# Altium PCB TB6600_Base.PcbDoc (part 1 of 4)
Units mm, origin at the board's own origin, x right, y up, seen from the top; angles counter-clockwise.
Board outline 300 x 300 mm, 2 copper layers (Top Layer, Bottom Layer); 129 components, 65 nets, 411 pads, 153 vias.
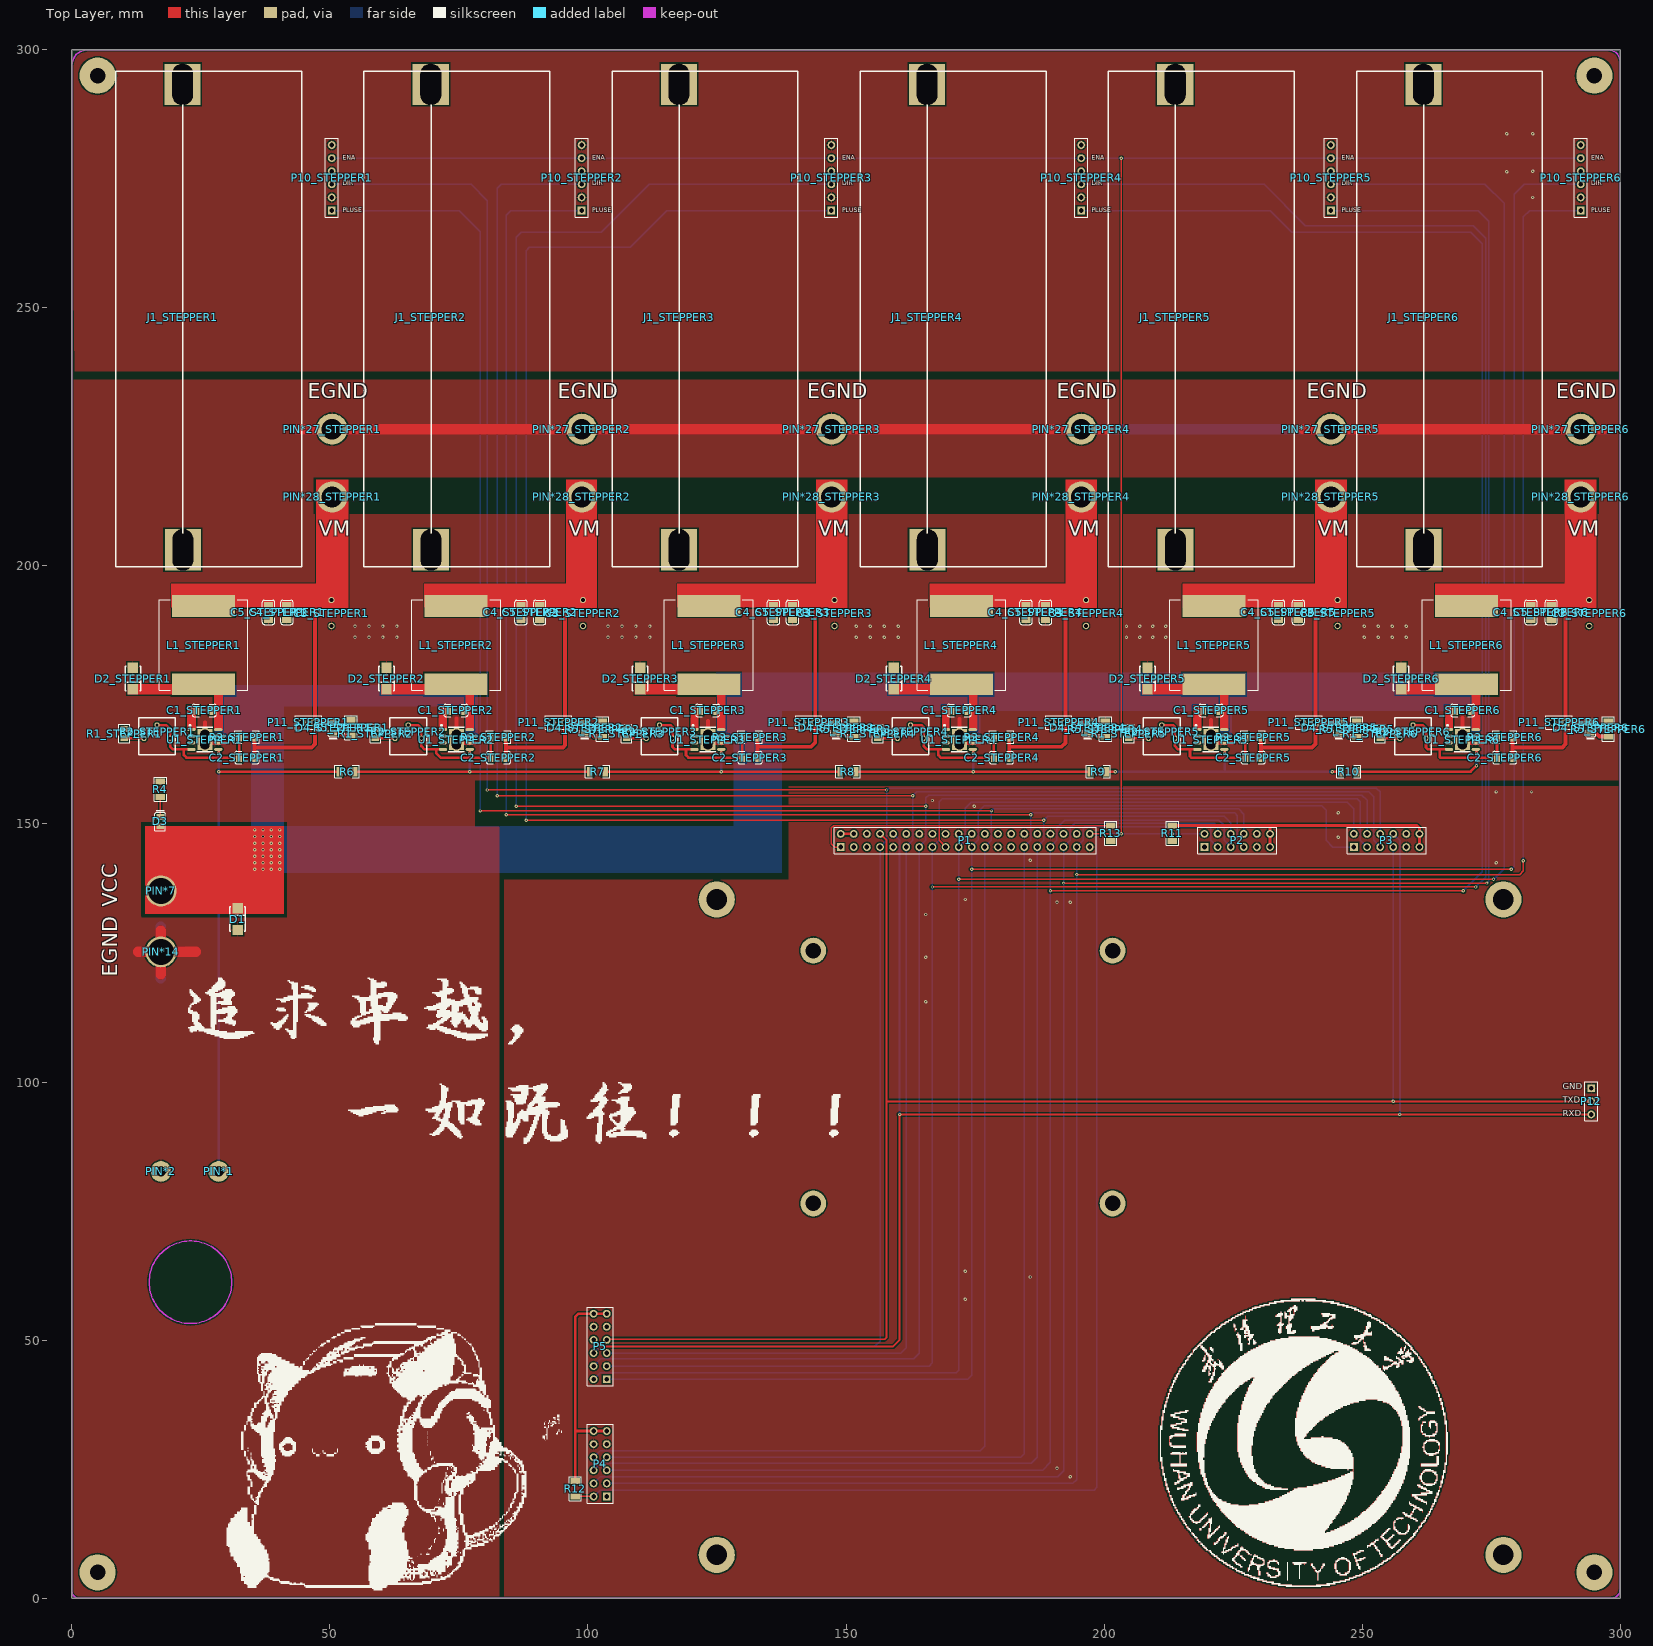
[diagram p0: Top Layer view]
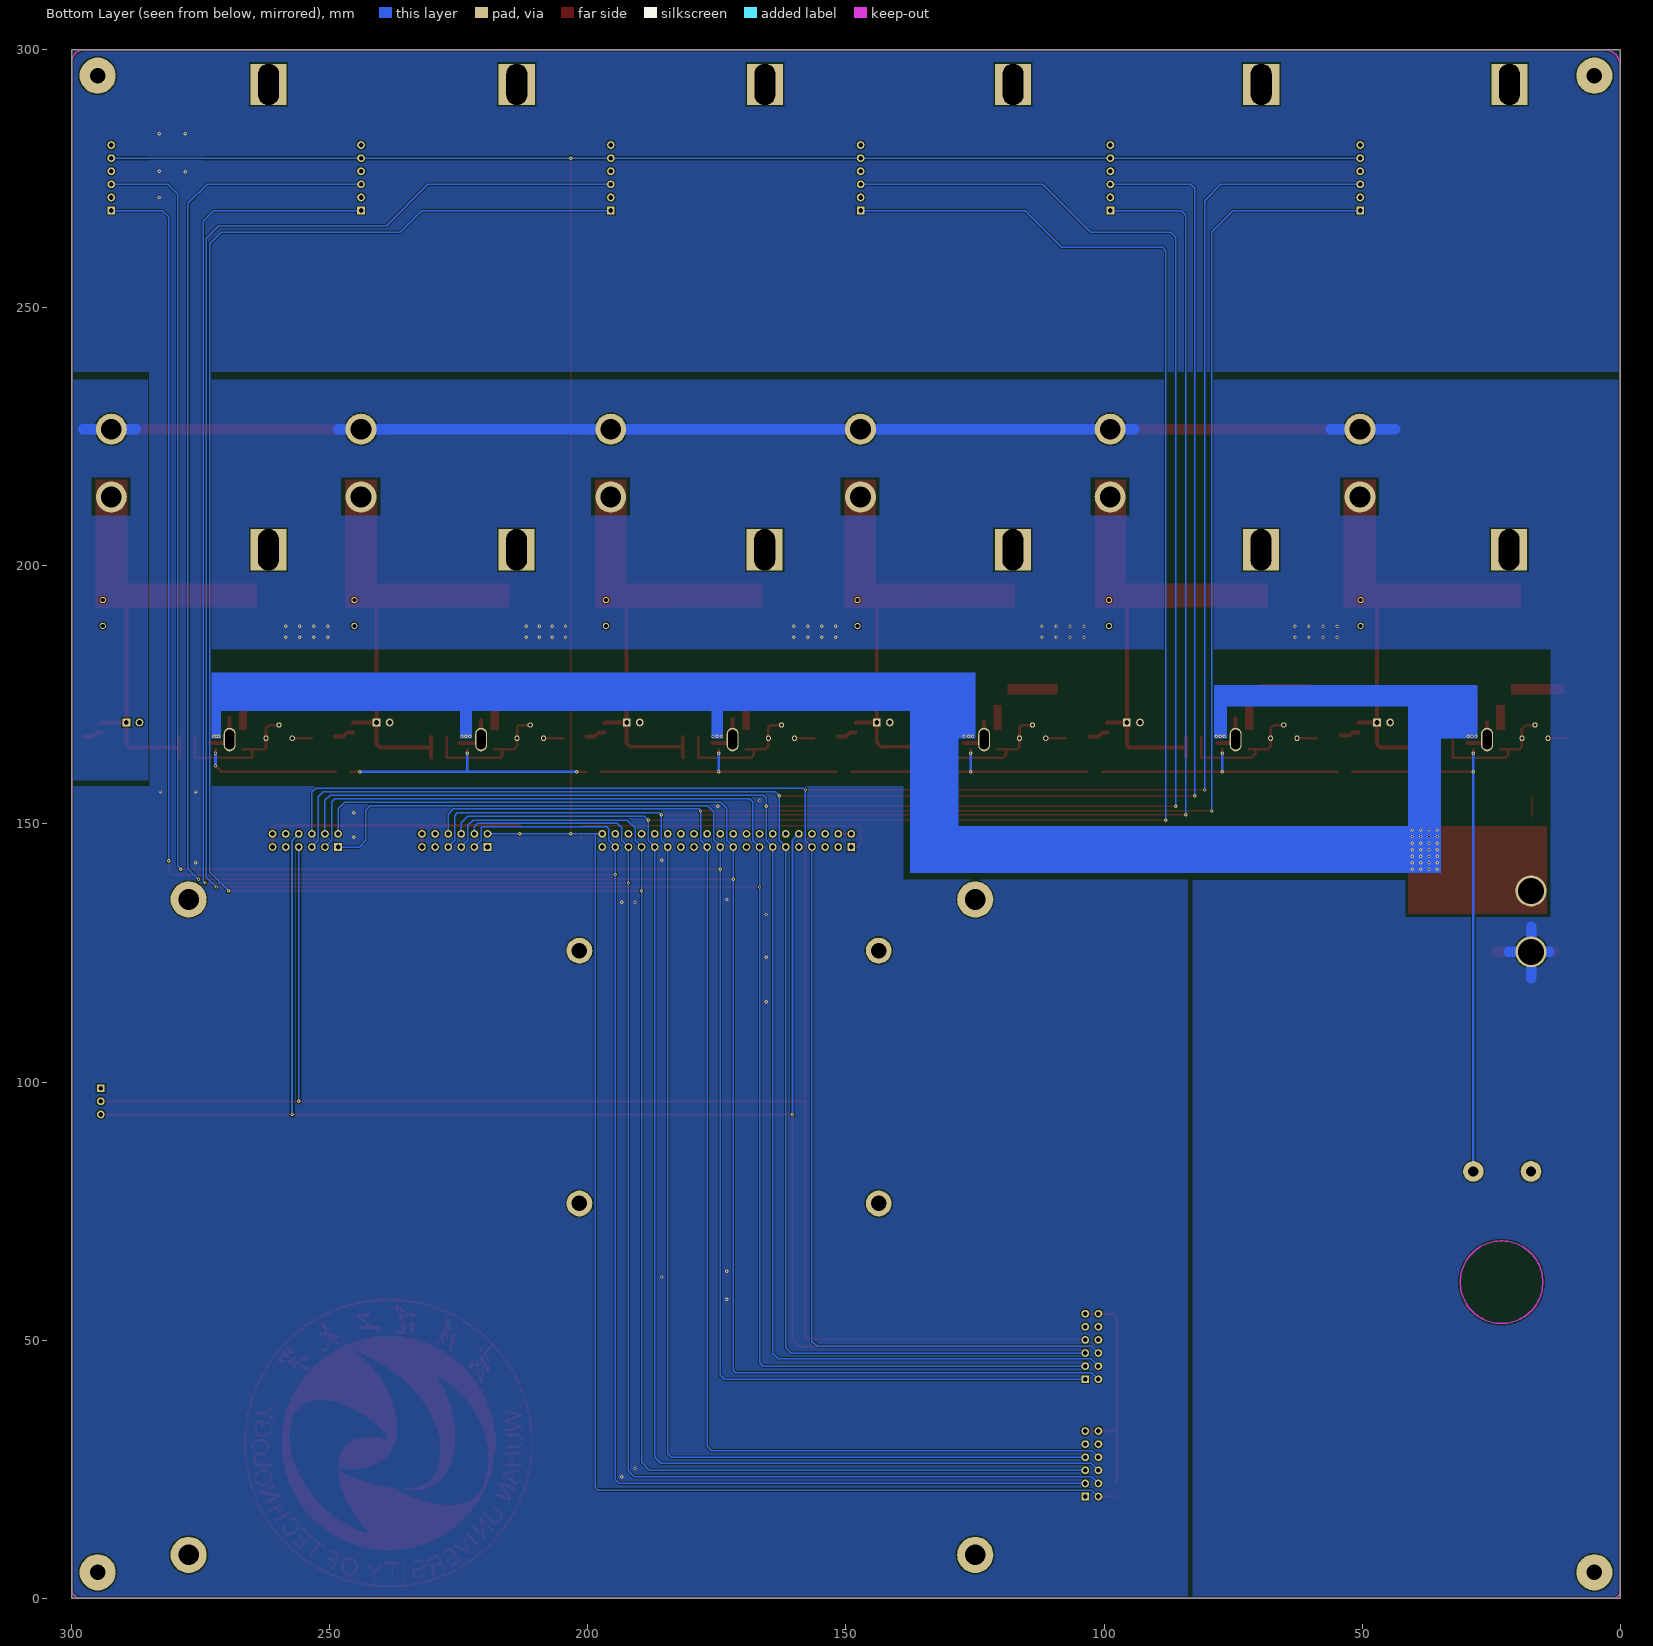
[diagram p1: Bottom Layer view, seen from below]

## Layer stack, top to bottom
Top Solder: solder mask 0.0102, Solder Resist, Dk 3.5
Top Layer: signal copper 0.0356
Dielectric 1: dielectric 0.32, FR-4, Dk 4.8
Bottom Layer: signal copper 0.0356
Bottom Solder: solder mask 0.0102, Solder Resist, Dk 3.5

## Board outline
0,0 0,300 300,300 300,0

## Design rules (kind name [scope] priority, off if disabled: settings)
Clearance [All] p1: gap=0.254 ignorepadtopadclearanceinfootprint=FALSE except(0: Arc-Hole Track-Hole SMDPad-Hole THPad-Hole Via-Hole Fill-Hole Poly-Hole Region-Hole Text-Hole)
PolygonConnect [All] p1: thpad.connectstyle=Relief thpad.reliefconductorwidth=0.254 thpad.reliefentries=4 thpad.polygonreliefangle="90 Angle" thpad.airgapwidth=0.254 smdpad.connectstyle=Relief smdpad.reliefconductorwidth=0.254 smdpad.reliefentries=4 smdpad.polygonreliefangle="90 Angle" smdpad.airgapwidth=0.254 via.connectstyle=Direct via.reliefconductorwidth=0.254 via.reliefentries=4 via.polygonreliefangle="90 Angle" via.airgapwidth=0.254
RoutingVias [All] p1: holewidth=0.711 width=1.27 viastyle="Through Hole" minholewidth=0.711 minwidth=1.27 maxholewidth=0.711 maxwidth=1.27
SolderMaskExpansion [All] p1: expansion=0.102
Width [All] p1: maxlimit=2.032 minlimit=0.152 preferedwidth=0.254 minimp=50.000000 maximp=50.000000 favimp=50.000000
30 further rules are at their usual default settings.

## Classes and differential pairs
net class SAFTY[1..6]: SAFTY1 SAFTY2 SAFTY3 SAFTY4 SAFTY5 SAFTY6
net class PLUSE[1..6]: PLUSE1 PLUSE2 PLUSE3 PLUSE4 PLUSE5 PLUSE6
net class DIR[1..6]: DIR1 DIR2 DIR3 DIR4 DIR5 DIR6
channel class TB6000: STEPPER1 STEPPER2 STEPPER3 STEPPER4 STEPPER5 STEPPER6
component class STEPPER6: C1_STEPPER6 C2_STEPPER6 C3_STEPPER6 C4_STEPPER6 C5_STEPPER6 D2_STEPPER6 D4_STEPPER6 J1_STEPPER6 L1_STEPPER6 P10_STEPPER6 P11_STEPPER6 PIN*27_STEPPER6 PIN*28_STEPPER6 R1_STEPPER6 R2_STEPPER6 R3_STEPPER6 R5_STEPPER6 U1_STEPPER6
component class STEPPER5: C1_STEPPER5 C2_STEPPER5 C3_STEPPER5 C4_STEPPER5 C5_STEPPER5 D2_STEPPER5 D4_STEPPER5 J1_STEPPER5 L1_STEPPER5 P10_STEPPER5 P11_STEPPER5 PIN*27_STEPPER5 PIN*28_STEPPER5 R1_STEPPER5 R2_STEPPER5 R3_STEPPER5 R5_STEPPER5 U1_STEPPER5
component class STEPPER4: C1_STEPPER4 C2_STEPPER4 C3_STEPPER4 C4_STEPPER4 C5_STEPPER4 D2_STEPPER4 D4_STEPPER4 J1_STEPPER4 L1_STEPPER4 P10_STEPPER4 P11_STEPPER4 PIN*27_STEPPER4 PIN*28_STEPPER4 R1_STEPPER4 R2_STEPPER4 R3_STEPPER4 R5_STEPPER4 U1_STEPPER4
component class STEPPER3: C1_STEPPER3 C2_STEPPER3 C3_STEPPER3 C4_STEPPER3 C5_STEPPER3 D2_STEPPER3 D4_STEPPER3 J1_STEPPER3 L1_STEPPER3 P10_STEPPER3 P11_STEPPER3 PIN*27_STEPPER3 PIN*28_STEPPER3 R1_STEPPER3 R2_STEPPER3 R3_STEPPER3 R5_STEPPER3 U1_STEPPER3
component class STEPPER2: C1_STEPPER2 C2_STEPPER2 C3_STEPPER2 C4_STEPPER2 C5_STEPPER2 D2_STEPPER2 D4_STEPPER2 J1_STEPPER2 L1_STEPPER2 P10_STEPPER2 P11_STEPPER2 PIN*27_STEPPER2 PIN*28_STEPPER2 R1_STEPPER2 R2_STEPPER2 R3_STEPPER2 R5_STEPPER2 U1_STEPPER2
component class STEPPER1: C1_STEPPER1 C2_STEPPER1 C3_STEPPER1 C4_STEPPER1 C5_STEPPER1 D2_STEPPER1 D4_STEPPER1 J1_STEPPER1 L1_STEPPER1 P10_STEPPER1 P11_STEPPER1 PIN*27_STEPPER1 PIN*28_STEPPER1 R1_STEPPER1 R2_STEPPER1 R3_STEPPER1 R5_STEPPER1 U1_STEPPER1
component class BASE-B: D1 D3 P1 P2 P3 P4 P5 P12 PIN*1 PIN*2 PIN*7 PIN*14 R4 R6 R7 R8 R9 R10 R11 R12 R13

## Components (designator, comment, footprint, x,y, rotation, side; value= is the part's Value field where it differs from the comment)
C1_STEPPER1 "10nF (103) 10% 50V" 1206_C 25.654,172.017 r0 top (schematic designator C1)
C1_STEPPER2 "10nF (103) 10% 50V" 1206_C 74.422,172.017 r0 top (schematic designator C1)
C1_STEPPER3 "10nF (103) 10% 50V" 1206_C 123.19,172.017 r0 top (schematic designator C1)
C1_STEPPER4 "10nF (103) 10% 50V" 1206_C 171.958,172.017 r0 top (schematic designator C1)
C1_STEPPER5 "10nF (103) 10% 50V" 1206_C 220.726,172.017 r0 top (schematic designator C1)
C1_STEPPER6 "10nF (103) 10% 50V" 1206_C 269.494,172.017 r0 top (schematic designator C1)
C2_STEPPER1 "1nF (102) 10% 500V" 1206_C 33.909,162.865 r180 top (schematic designator C2)
C2_STEPPER2 "1nF (102) 10% 500V" 1206_C 82.652,162.865 r180 top (schematic designator C2)
C2_STEPPER3 "1nF (102) 10% 500V" 1206_C 131.394,162.865 r180 top (schematic designator C2)
C2_STEPPER4 "1nF (102) 10% 500V" 1206_C 180.137,162.865 r180 top (schematic designator C2)
C2_STEPPER5 "1nF (102) 10% 500V" 1206_C 228.879,162.865 r180 top (schematic designator C2)
C2_STEPPER6 "1nF (102) 10% 500V" 1206_C 277.622,162.865 r180 top (schematic designator C2)
C3_STEPPER1 "Cap" C100uF 50.292,190.881 r0 top value=100uF (schematic designator C3)
C3_STEPPER2 "Cap" C100uF 99.035,190.881 r0 top value=100uF (schematic designator C3)
C3_STEPPER3 "Cap" C100uF 147.777,190.881 r0 top value=100uF (schematic designator C3)
C3_STEPPER4 "Cap" C100uF 196.52,190.881 r0 top value=100uF (schematic designator C3)
C3_STEPPER5 "Cap" C100uF 245.262,190.881 r0 top value=100uF (schematic designator C3)
C3_STEPPER6 "Cap" C100uF 294.005,190.881 r0 top value=100uF (schematic designator C3)
C4_STEPPER1 "4.7uF (475) 10% 50V" 1206_C 41.656,191.008 r270 top (schematic designator C4)
C4_STEPPER2 "4.7uF (475) 10% 50V" 1206_C 87.02,191.008 r270 top (schematic designator C4)
C4_STEPPER3 "4.7uF (475) 10% 50V" 1206_C 135.941,191.008 r270 top (schematic designator C4)
C4_STEPPER4 "4.7uF (475) 10% 50V" 1206_C 184.861,191.008 r270 top (schematic designator C4)
C4_STEPPER5 "4.7uF (475) 10% 50V" 1206_C 233.782,191.008 r270 top (schematic designator C4)
C4_STEPPER6 "4.7uF (475) 10% 50V" 1206_C 282.702,191.008 r270 top (schematic designator C4)
C5_STEPPER1 "10nF (103) 10% 50V" 1206_C 38.1,191.008 r270 top (schematic designator C5)
C5_STEPPER2 "10nF (103) 10% 50V" 1206_C 90.653,191.008 r270 top (schematic designator C5)
C5_STEPPER3 "10nF (103) 10% 50V" 1206_C 139.649,191.008 r270 top (schematic designator C5)
C5_STEPPER4 "10nF (103) 10% 50V" 1206_C 188.646,191.008 r270 top (schematic designator C5)
C5_STEPPER5 "10nF (103) 10% 50V" 1206_C 237.642,191.008 r270 top (schematic designator C5)
C5_STEPPER6 "10nF (103) 10% 50V" 1206_C 286.639,191.008 r270 top (schematic designator C5)
D1 "M7" SMA(DO-214AC)_S1 32.131,131.572 r270 top
D2_STEPPER1 "SS54" SMA(DO-214AC)_S1 11.811,178.181 r90 top (schematic designator D2)
D2_STEPPER2 "SS54" SMA(DO-214AC)_S1 60.96,178.181 r90 top (schematic designator D2)
D2_STEPPER3 "SS54" SMA(DO-214AC)_S1 110.109,178.181 r90 top (schematic designator D2)
D2_STEPPER4 "SS54" SMA(DO-214AC)_S1 159.258,178.181 r90 top (schematic designator D2)
D2_STEPPER5 "SS54" SMA(DO-214AC)_S1 208.407,178.181 r90 top (schematic designator D2)
D2_STEPPER6 "SS54" SMA(DO-214AC)_S1 257.556,178.181 r90 top (schematic designator D2)
D3 "白灯 0805" 0805_LED_S1 17.107,150.495 r270 top
D4_STEPPER1 "翠绿 0805" 0805_LED_S1 50.673,168.656 r90 top (schematic designator D4)
D4_STEPPER2 "翠绿 0805" 0805_LED_S1 99.39,168.656 r90 top (schematic designator D4)
D4_STEPPER3 "翠绿 0805" 0805_LED_S1 148.107,168.656 r90 top (schematic designator D4)
D4_STEPPER4 "翠绿 0805" 0805_LED_S1 196.825,168.656 r90 top (schematic designator D4)
D4_STEPPER5 "翠绿 0805" 0805_LED_S1 245.542,168.656 r90 top (schematic designator D4)
D4_STEPPER6 "翠绿 0805" 0805_LED_S1 294.259,168.656 r90 top (schematic designator D4)
J1_STEPPER1 "Socket" PCBComponent_1 8.509,199.83 r0 top (schematic designator J1)
J1_STEPPER2 "Socket" PCBComponent_1 56.591,199.83 r0 top (schematic designator J1)
J1_STEPPER3 "Socket" PCBComponent_1 104.673,199.83 r0 top (schematic designator J1)
J1_STEPPER4 "Socket" PCBComponent_1 152.756,199.83 r0 top (schematic designator J1)
J1_STEPPER5 "Socket" PCBComponent_1 200.838,199.83 r0 top (schematic designator J1)
J1_STEPPER6 "Socket" PCBComponent_1 248.92,199.83 r0 top (schematic designator J1)
L1_STEPPER1 "Inductor" INDP175172X70M 25.527,184.658 r90 top value=15uH (schematic designator L1)
L1_STEPPER2 "Inductor" INDP175172X70M 74.473,184.658 r90 top value=15uH (schematic designator L1)
L1_STEPPER3 "Inductor" INDP175172X70M 123.419,184.658 r90 top value=15uH (schematic designator L1)
L1_STEPPER4 "Inductor" INDP175172X70M 172.364,184.658 r90 top value=15uH (schematic designator L1)
L1_STEPPER5 "Inductor" INDP175172X70M 221.31,184.658 r90 top value=15uH (schematic designator L1)
L1_STEPPER6 "Inductor" INDP175172X70M 270.256,184.658 r90 top value=15uH (schematic designator L1)
P1 "Header 20X2" HDR2X20 148.971,145.542 r0 top
P2 "Header 6X2" HDR2X6 219.456,145.542 r0 top
P3 "Header 6X2" HDR2X6 248.412,145.542 r0 top
P4 "Header 6X2" HDR2X6 103.632,19.685 r90 top
P5 "Header 6X2" HDR2X6 103.632,42.418 r90 top
P10_STEPPER1 "Header 6" HDR1X6 50.373,268.859 r90 top (schematic designator P10)
P10_STEPPER2 "Header 6" HDR1X6 98.769,268.859 r90 top (schematic designator P10)
P10_STEPPER3 "Header 6" HDR1X6 147.165,268.859 r90 top (schematic designator P10)
P10_STEPPER4 "Header 6" HDR1X6 195.561,268.859 r90 top (schematic designator P10)
P10_STEPPER5 "Header 6" HDR1X6 243.958,268.859 r90 top (schematic designator P10)
P10_STEPPER6 "Header 6" HDR1X6 292.354,268.859 r90 top (schematic designator P10)
P11_STEPPER1 "Header 2" HDR1X2 47.117,169.672 r180 top (schematic designator P11)
P11_STEPPER2 "Header 2" HDR1X2 95.58,169.672 r180 top (schematic designator P11)
P11_STEPPER3 "Header 2" HDR1X2 144.043,169.672 r180 top (schematic designator P11)
P11_STEPPER4 "Header 2" HDR1X2 192.507,169.672 r180 top (schematic designator P11)
P11_STEPPER5 "Header 2" HDR1X2 240.97,169.672 r180 top (schematic designator P11)
P11_STEPPER6 "Header 2" HDR1X2 289.433,169.672 r180 top (schematic designator P11)
P12 "Header 3" HDR1X3 294.386,98.806 r270 top
PIN*1 "PIN" PIN#1 28.448,82.677 r0 top
PIN*2 "PIN" PIN#1 17.272,82.677 r0 top
PIN*7 "PIN" PIN#2 17.272,137.033 r0 top
PIN*14 "PIN" PIN#2 17.272,125.222 r0 top
PIN*27_STEPPER1 "PIN" PIN#3 50.419,226.509 r90 top (schematic designator PIN*27)
PIN*27_STEPPER2 "PIN" PIN#3 98.806,226.509 r90 top (schematic designator PIN*27)
PIN*27_STEPPER3 "PIN" PIN#3 147.193,226.509 r90 top (schematic designator PIN*27)
PIN*27_STEPPER4 "PIN" PIN#3 195.58,226.509 r90 top (schematic designator PIN*27)
PIN*27_STEPPER5 "PIN" PIN#3 243.967,226.509 r90 top (schematic designator PIN*27)
PIN*27_STEPPER6 "PIN" PIN#3 292.354,226.509 r90 top (schematic designator PIN*27)
PIN*28_STEPPER1 "PIN" PIN#3 50.419,213.36 r90 top (schematic designator PIN*28)
PIN*28_STEPPER2 "PIN" PIN#3 98.806,213.36 r90 top (schematic designator PIN*28)
PIN*28_STEPPER3 "PIN" PIN#3 147.193,213.36 r90 top (schematic designator PIN*28)
PIN*28_STEPPER4 "PIN" PIN#3 195.58,213.36 r90 top (schematic designator PIN*28)
PIN*28_STEPPER5 "PIN" PIN#3 243.967,213.36 r90 top (schematic designator PIN*28)
PIN*28_STEPPER6 "PIN" PIN#3 292.354,213.36 r90 top (schematic designator PIN*28)
R1_STEPPER1 "510Ω (5100) ±1%" 0805_R 10.16,167.513 r270 top (schematic designator R1)
R1_STEPPER2 "510Ω (5100) ±1%" 0805_R 58.826,167.513 r270 top (schematic designator R1)
R1_STEPPER3 "510Ω (5100) ±1%" 0805_R 107.493,167.513 r270 top (schematic designator R1)
R1_STEPPER4 "510Ω (5100) ±1%" 0805_R 156.159,167.513 r270 top (schematic designator R1)
R1_STEPPER5 "510Ω (5100) ±1%" 0805_R 204.826,167.513 r270 top (schematic designator R1)
R1_STEPPER6 "510Ω (5100) ±1%" 0805_R 253.492,167.513 r270 top (schematic designator R1)
R2_STEPPER1 "RPot" RP1 16.51,167.894 r0 top value=1K (schematic designator R2)
R2_STEPPER2 "RPot" RP1 65.176,167.894 r0 top value=1K (schematic designator R2)
R2_STEPPER3 "RPot" RP1 113.843,167.894 r0 top value=1K (schematic designator R2)
R2_STEPPER4 "RPot" RP1 162.509,167.894 r0 top value=1K (schematic designator R2)
R2_STEPPER5 "RPot" RP1 211.176,167.894 r0 top value=1K (schematic designator R2)
R2_STEPPER6 "RPot" RP1 259.842,167.894 r0 top value=1K (schematic designator R2)
R3_STEPPER1 "10KΩ (1002) ±1%" 1206_R 33.909,166.853 r180 top (schematic designator R3)
R3_STEPPER2 "10KΩ (1002) ±1%" 1206_R 82.652,166.853 r180 top (schematic designator R3)
R3_STEPPER3 "10KΩ (1002) ±1%" 1206_R 131.394,166.853 r180 top (schematic designator R3)
R3_STEPPER4 "10KΩ (1002) ±1%" 1206_R 180.137,166.853 r180 top (schematic designator R3)
R3_STEPPER5 "10KΩ (1002) ±1%" 1206_R 228.879,166.853 r180 top (schematic designator R3)
R3_STEPPER6 "10KΩ (1002) ±1%" 1206_R 277.622,166.853 r180 top (schematic designator R3)
R4 "4.7KΩ (4701) ±1%" 1206_R 17.145,156.718 r90 top
R5_STEPPER1 "4.7KΩ (4701) ±1%" 1206_R 54.102,168.656 r90 top (schematic designator R5)
R5_STEPPER2 "4.7KΩ (4701) ±1%" 1206_R 102.819,168.403 r90 top (schematic designator R5)
R5_STEPPER3 "4.7KΩ (4701) ±1%" 1206_R 151.536,168.403 r90 top (schematic designator R5)
R5_STEPPER4 "4.7KΩ (4701) ±1%" 1206_R 200.254,168.403 r90 top (schematic designator R5)
R5_STEPPER5 "4.7KΩ (4701) ±1%" 1206_R 248.971,168.403 r90 top (schematic designator R5)
R5_STEPPER6 "4.7KΩ (4701) ±1%" 1206_R 297.688,168.403 r90 top (schematic designator R5)
R6 "22Ω (22R0) ±1%" 1206_R 53.34,160.147 r0 top
R7 "22Ω (22R0) ±1%" 1206_R 101.854,160.147 r0 top
R8 "22Ω (22R0) ±1%" 1206_R 150.368,160.147 r0 top
R9 "22Ω (22R0) ±1%" 1206_R 198.882,160.147 r0 top
R10 "22Ω (22R0) ±1%" 1206_R 247.396,160.147 r0 top
R11 "10KΩ (1002) ±1%" 1206_R 213.233,148.209 r90 top
R12 "10KΩ (1002) ±1%" 1206_R 97.536,21.209 r90 top
R13 "10KΩ (1002) ±1%" 1206_R 201.295,148.209 r90 top
U1_STEPPER1 "TPS5450" LC-SOP-8_EP_150mil 25.781,166.37 r270 top (schematic designator U1)
U1_STEPPER2 "TPS5450" LC-SOP-8_EP_150mil 74.51,166.37 r270 top (schematic designator U1)
U1_STEPPER3 "TPS5450" LC-SOP-8_EP_150mil 123.239,166.37 r270 top (schematic designator U1)
U1_STEPPER4 "TPS5450" LC-SOP-8_EP_150mil 171.969,166.37 r270 top (schematic designator U1)
U1_STEPPER5 "TPS5450" LC-SOP-8_EP_150mil 220.698,166.37 r270 top (schematic designator U1)
U1_STEPPER6 "TPS5450" LC-SOP-8_EP_150mil 269.427,166.37 r270 top (schematic designator U1)

## Footprints (in the part's own frame and the unit in brackets; to place one, negate y for a bottom-side part, rotate by r counter-clockwise, add the part's x,y. Pads: shape width x height; smd on the part's side, far side on the other; paste and mask are expansions set on the pad)
0805_LED_S1 [mm]
  rect 1.16x1.47 smd: A(0.89,0) K(-0.89,0)
  silkscreen extent -2.25,-1.04 1.77,1.03, body extent -1.01,-0.62 1.01,0.62, height 1.1
0805_R [mm]
  rect 1.16x1.47 smd: 1(-0.89,0) 2(0.89,0)
  silkscreen extent -1.77,-1.04 1.77,1.03, body extent -1,-0.62 1,0.63, height 0.49
1206_C [mm]
  rect 1.13x1.8 smd: 1(-1.49,0) 2(1.49,0)
  silkscreen extent -2.36,-1.2 2.35,1.2, body extent -1.6,-0.81 1.6,0.79, height 1
1206_R [mm]
  rect 1.13x1.8 smd: 1(-1.49,0) 2(1.49,0)
  silkscreen extent -2.36,-1.2 2.35,1.2, body extent -1.7,-0.86 1.65,0.87, height 0.85
C100uF [mm]
  round 1.2 hole 0.8: 1(0,2.5) 2(0,-2.5)
HDR1X2 [mm] "Connector; Header; 2 Position"
  rect 1.5x1.5 hole 0.9: 1(0,0)
  round 1.5 hole 0.9: 2(2.54,0)
  silkscreen extent -1.27,-1.27 3.81,1.27, body extent -1.27,-1.27 3.81,1.27, height 7.58
HDR1X3 [mm] "Connector; Header; 3 Position"
  rect 1.5x1.5 hole 0.9: 1(0,0)
  round 1.5 hole 0.9: 2(2.54,0) 3(5.08,0)
  silkscreen extent -1.27,-1.27 6.35,1.27, body extent -1.27,-1.27 6.35,1.27, height 7.58
HDR1X6 [mm] "Connector; Header; 6 Position"
  rect 1.5x1.5 hole 0.9: 1(0,0)
  round 1.5 hole 0.9: 2(2.54,0) 3(5.08,0) 4(7.62,0) 5(10.16,0) 6(12.7,0)
  silkscreen extent -1.27,-1.27 13.97,1.27, body extent -1.27,-1.27 13.97,1.27, height 7.58
HDR2X6 [mm] "Connector; Header; 6x2 Position"
  rect 1.5x1.5 hole 0.9: 1(0,0)
  round 1.5 hole 0.9: 2(0,2.54) 3(2.54,0) 4(2.54,2.54) 5(5.08,0) 6(5.08,2.54) 7(7.62,0) 8(7.62,2.54) 9(10.16,0) 10(10.16,2.54) 11(12.7,0) 12(12.7,2.54)
  silkscreen extent -1.27,-1.27 13.97,3.81, body extent -1.27,-1.27 13.97,3.81, height 7.58
HDR2X20 [mm] "Connector; Header; 20x2 Position"
  rect 1.5x1.5 hole 0.9: 1(0,0)
  round 1.5 hole 0.9: 2(0,2.54) 3(2.54,0) 4(2.54,2.54) 5(5.08,0) 6(5.08,2.54) 7(7.62,0) 8(7.62,2.54) 9(10.16,0) 10(10.16,2.54) 11(12.7,0) 12(12.7,2.54) 13(15.24,0) 14(15.24,2.54) 15(17.78,0) 16(17.78,2.54) 17(20.32,0) 18(20.32,2.54) 19(22.86,0) 20(22.86,2.54) 21(25.4,0) 22(25.4,2.54) 23(27.94,0) 24(27.94,2.54) 25(30.48,0) 26(30.48,2.54) 27(33.02,0) 28(33.02,2.54) 29(35.56,0) 30(35.56,2.54) 31(38.1,0) 32(38.1,2.54) 33(40.64,0) 34(40.64,2.54) 35(43.18,0) 36(43.18,2.54) 37(45.72,0) 38(45.72,2.54) 39(48.26,0) 40(48.26,2.54)
  silkscreen extent -1.27,-1.27 49.53,3.81, body extent -1.27,-1.27 49.53,3.81, height 7.58
INDP175172X70M [mm] "Precision Wire Wound Inductor, 2-Leads, Body 17.50x17.15mm, IPC Low Density"
  rect 4.25x12.2 smd: 1(-7.575,0) 2(7.575,0)
  silkscreen extent -8.75,-8.6 8.75,8.6, body extent -8.75,-8.57 8.75,8.57, height 7
LC-SOP-8_EP_150mil [mm] "TPS5450"
  rect 4x2.9 smd: 0(0,0)
  oval 0.6x1.6 smd: 1(-1.905,-2.6) 2(-0.635,-2.6) 3(0.635,-2.6) 4(1.905,-2.6) 5(1.905,2.6) 6(0.635,2.6) 7(-0.635,2.6) 8(-1.905,2.6)
  silkscreen extent -2.85,-3.05 2.4,1.5
PCBComponent_1 [mm]
  rect 7x8 hole 4 slot 8 at 90 deg: 9(12.954,93.472) 9(13,3.302)
  silkscreen extent 0,0 36,96
PIN#1 [mm]
  round 4 hole 2: 1(0,0)
PIN#2 [mm]
  round 6 hole 5: 1(0,0)
PIN#3 [mm]
  round 6 hole 4: 1(0,0)
RP1 [mm]
  oct 1x1 hole 0.6: 1(-2.54,-1.27) 2(0,1.27) 3(2.54,-1.27)
  silkscreen extent -3.56,-4.44 3.56,2.67, body extent -3.56,-4.44 3.56,2.67, height 6.35
SMA(DO-214AC)_S1 [mm]
  rect 2x2 smd: 1(2.1,0) 2(-2.1,0)
  silkscreen extent -2.35,-1.5 2.35,1.5

## Part data
C1_STEPPER1 C1_STEPPER2 C1_STEPPER3 C1_STEPPER4 C1_STEPPER5 C1_STEPPER6 C5_STEPPER1 C5_STEPPER2 C5_STEPPER3 C5_STEPPER4 C5_STEPPER5 C5_STEPPER6: library part "1206 10nF (103) 10% 50V", "贴片电容", Package=1206, SuppliersPartNumber=C1846, ComponentLink1Description=供应商链接, ComponentLink1URL=http://www.szlcsc.com/product/details_2198.html, Supplier=LC
C2_STEPPER1 C2_STEPPER2 C2_STEPPER3 C2_STEPPER4 C2_STEPPER5 C2_STEPPER6: library part "1206 1nF (102) 10% 500V", "贴片电容", Package=1206, SuppliersPartNumber=C35216, ComponentLink1Description=供应商链接, ComponentLink1URL=http://www.szlcsc.com/product/details_36187.html, Supplier=LC
C3_STEPPER1 C3_STEPPER2 C3_STEPPER3 C3_STEPPER4 C3_STEPPER5 C3_STEPPER6: "贴片电容", LatestRevisionDate=17-Jul-2002, LatestRevisionNote="Re-released for DXP Platform.", PackageReference=RAD-0.3, Published=8-Jun-2000, Publisher="Altium Limited"
C4_STEPPER1 C4_STEPPER2 C4_STEPPER3 C4_STEPPER4 C4_STEPPER5 C4_STEPPER6: library part "1206 4.7uF (475) 10% 50V", "贴片电容", Package=1206, SuppliersPartNumber=C29823, ComponentLink1Description=供应商链接, ComponentLink1URL=http://www.szlcsc.com/product/details_30577.html, Supplier=LC
D1: library part "SMA(DO-214AC) M7", "二极管", Package=SMA(DO-214AC), SuppliersPartNumber=C95872, ComponentLink1Description=供应商链接, ComponentLink1URL=http://www.szlcsc.com/product/details_2841.html, Supplier=LC, 备注="1N4007 4007 编号C2464 已经停售, 使用新物料编号C95872"
D2_STEPPER1 D2_STEPPER2 D2_STEPPER3 D2_STEPPER4 D2_STEPPER5 D2_STEPPER6: library part "SMA(DO-214AC) SS54", "二极管", Package=SMA(DO-214AC), SuppliersPartNumber=C22452, ComponentLink1Description=供应商链接, ComponentLink1URL=http://www.szlcsc.com/product/details_23178.html, Supplier=LC
D3: library part "0805 白灯", "发光二极管", Package=0805, SuppliersPartNumber=C34499, ComponentLink1Description=供应商链接, ComponentLink1URL=http://www.szlcsc.com/product/details_35468.html, Supplier=LC
D4_STEPPER1 D4_STEPPER2 D4_STEPPER3 D4_STEPPER4 D4_STEPPER5 D4_STEPPER6: library part "0805 翠绿", "发光二极管", Package=0805, SuppliersPartNumber=C2297, ComponentLink1Description=供应商链接, ComponentLink1URL=http://www.szlcsc.com/product/details_2670.html, Supplier=LC
P1: "Header, 20-Pin, Dual row", LatestRevisionDate=17-Jul-2002, LatestRevisionNote="Re-released for DXP Platform.", Publisher="Altium Limited"
P2 P3 P4 P5: "Header, 6-Pin, Dual row", LatestRevisionDate=17-Jul-2002, LatestRevisionNote="Re-released for DXP Platform.", Publisher="Altium Limited"
P10_STEPPER1 P10_STEPPER2 P10_STEPPER3 P10_STEPPER4 P10_STEPPER5 P10_STEPPER6: "Header, 6-Pin", LatestRevisionDate=17-Jul-2002, LatestRevisionNote="Re-released for DXP Platform.", Publisher="Altium Limited"
P11_STEPPER1 P11_STEPPER2 P11_STEPPER3 P11_STEPPER4 P11_STEPPER5 P11_STEPPER6: "Header, 2-Pin", LatestRevisionDate=17-Jul-2002, LatestRevisionNote="Re-released for DXP Platform.", Publisher="Altium Limited"
P12: "Header, 3-Pin", LatestRevisionDate=17-Jul-2002, LatestRevisionNote="Re-released for DXP Platform.", Publisher="Altium Limited"
R1_STEPPER1 R1_STEPPER2 R1_STEPPER3 R1_STEPPER4 R1_STEPPER5 R1_STEPPER6: library part "0805 510Ω (5100) 1%", "贴片电阻", Package=0805, SuppliersPartNumber=C17734, ComponentLink1Description=供应商链接, ComponentLink1URL=http://www.szlcsc.com/product/details_18422.html, Supplier=LC
R2_STEPPER1 R2_STEPPER2 R2_STEPPER3 R2_STEPPER4 R2_STEPPER5 R2_STEPPER6: "电位器", LatestRevisionDate=17-Jul-2002, LatestRevisionNote="Re-released for DXP Platform.", PackageReference=VR5, Published=8-Jun-2000, Publisher="Altium Limited", Set Position=0.5, Sim Note="Enter the Resistance value and the set point into parameter fields."
R3_STEPPER1 R3_STEPPER2 R3_STEPPER3 R3_STEPPER4 R3_STEPPER5 R3_STEPPER6 R11 R12 R13: library part "1206 10KΩ (1002) 1%", "贴片电阻", Package=1206, SuppliersPartNumber=C17902, ComponentLink1Description=供应商链接, ComponentLink1URL=http://www.szlcsc.com/product/details_18590.html, Supplier=LC
R4 R5_STEPPER1 R5_STEPPER2 R5_STEPPER3 R5_STEPPER4 R5_STEPPER5 R5_STEPPER6: library part "1206 4.7KΩ (4701) 1%", "贴片电阻", Package=1206, SuppliersPartNumber=C17936, ComponentLink1Description=供应商链接, ComponentLink1URL=http://www.szlcsc.com/product/details_18624.html, Supplier=LC
R6 R7 R8 R9 R10: library part "1206 22Ω (22R0) 1%", "贴片电阻", Package=1206, SuppliersPartNumber=C17958, ComponentLink1Description=供应商链接, ComponentLink1URL=http://www.szlcsc.com/product/details_18646.html, Supplier=LC
J1_STEPPER1 J1_STEPPER2 J1_STEPPER3 J1_STEPPER4 J1_STEPPER5 J1_STEPPER6: LatestRevisionDate=17-Jul-2002, LatestRevisionNote="Re-released for DXP Platform.", Publisher="Altium Limited"
L1_STEPPER1 L1_STEPPER2 L1_STEPPER3 L1_STEPPER4 L1_STEPPER5 L1_STEPPER6: Code_IEC=1005, Code_JEITA=0402, LatestRevisionDate=29-May-2009, LatestRevisionNote="IPC-7351 Footprint Added.", PackageDescription="Chip Inductor", PackageReference=0402-A, Published=8-Jun-2000, Publisher="Altium Limited"

## Free pads (board coordinates)
  oval 2.286x4.572 hole 1.778 slot 3.81 at 90 deg: 1(25.781,166.37) 1(74.51,166.37) 1(123.239,166.37) 1(171.969,166.37) 1(220.698,166.37) 1(269.427,166.37)
  round 7 hole 3: 2(295,295) 3(5,295) 4(5,5) 5(295,5)
  round 5 hole 3: 6(143.662,125.476) 7(143.662,76.476) 8(201.662,125.476) 9(201.662,76.476)
  round 7 hole 4: 10(124.968,8.382) 11(124.968,135.382) 12(277.368,135.382) 13(277.368,8.382)

## Via types
v1: diameter 0.65, hole 0.3, Top Layer to Bottom Layer, tented both sides, 153 vias

## Nets (pads, with @x,y where several pads share a name; then routed paths per layer and width w, separated by ;. In a path a pad name is that pad's centre, name@x,y a point inside that pad or via, vN(x,y) a via of type N, cw(c..) or ccw(c..) an arc to the next point about the centre after c; other vN are vias at no path point)
3V3_1: P1.1 P1.17 R13.2 | length 64.1
  Top Layer w0.254: P1.1@148.971,145.542 147.828,145.542 147.165,146.205 147.165,149.225 147.639,149.699 168.021,149.699 ; P1.17@169.291,145.542 168.021,146.812 168.021,149.699 ; R13.2@201.295,149.699 168.021,149.699
3V3_2: P4.11 P4.12 P5.11 P5.12 R12.2 | length 44.2
  Top Layer w0.508: R12.2@97.536,22.699 97.536,32.385 ; P4.11@103.632,32.385 P4.12@101.092,32.385 97.536,32.385 ; P5.11@103.632,55.118 P5.12@101.092,55.118 98.171,55.118 97.536,54.483 97.536,32.385
3V3_3: P2.11 P2.12 P3.11 P3.12 R11.2 | length 55.9
  Top Layer w0.508: R11.2@213.233,149.699 232.156,149.699 ; P2.11@232.156,145.542 P2.12@232.156,148.082 232.156,149.699 ; P3.11@261.112,145.542 P3.12@261.112,148.082 261.112,149.225 260.638,149.699 232.156,149.699
+5: P1.2 P1.4 | length 2.5
  Top Layer w0.508: P1.2@148.971,148.082 P1.4@151.511,148.082
DIR1: P1.7 P3.6 P5.6 P10_STEPPER1.3 | length 491
  Top Layer w0.254: v1(80.518,156.591) v1(157.861,156.591)
  Bottom Layer w0.254: P10_STEPPER1.3@50.373,273.939 77.343,273.939 80.518,270.764 v1(80.518,156.591) ; P5.6@101.092,47.498 102.362,48.768 155.575,48.768 156.591,49.784 P1.7@156.591,145.542 157.861,146.812 v1(157.861,156.591) 158.242,156.972 252.73,156.972 253.492,156.21 P3.6@253.492,148.082
DIR2: P1.11 P3.5 P5.5 P10_STEPPER2.3 | length 481.1
  Top Layer w0.254: v1(82.423,155.448) v1(162.941,155.448)
  Bottom Layer w0.254: v1(82.423,155.448) 82.423,273.177 83.185,273.939 P10_STEPPER2.3@98.769,273.939 ; P5.5@103.632,47.498 160.655,47.498 161.671,48.514 P1.11@161.671,145.542 162.941,146.812 v1(162.941,155.448) 163.703,156.21 251.333,156.21 252.222,155.321 252.222,146.812 P3.5@253.492,145.542
DIR3: P1.13 P3.4 P5.4 P10_STEPPER3.3 | length 519.8
  Top Layer w0.254: v1(86.106,153.416) v1(165.481,153.416)
  Bottom Layer w0.254: v1(86.106,153.416) 86.106,263.652 87.122,264.668 102.616,264.668 111.887,273.939 P10_STEPPER3.3@147.165,273.939 ; P5.4@101.092,44.958 102.501,46.367 163.08,46.367 164.211,47.498 164.211,114.554 P1.13@164.211,145.542 165.481,146.812 v1(165.481,153.416) 165.481,155.046 166.01,155.575 249.936,155.575 250.952,154.559 P3.4@250.952,148.082
DIR4: P1.15 P3.3 P5.3 P10_STEPPER4.3 | length 578.6
  Top Layer w0.254: v1(166.751,137.795) v1(272.034,137.795)
  Bottom Layer w0.254: P5.3@103.632,44.958 166.116,44.958 166.751,45.593 v1(166.751,137.795) P1.15@166.751,145.542 168.021,146.812 168.021,154.305 168.656,154.94 249.047,154.94 249.682,154.305 249.682,146.812 P3.3@250.952,145.542 ; P10_STEPPER4.3@195.561,273.939 231.013,273.939 239.014,265.938 271.526,265.938 273.939,263.525 273.939,139.7 v1(272.034,137.795)
DIR5: P1.19 P3.2 P5.2 P10_STEPPER5.3 | length 532.5
  Top Layer w0.254: v1(171.831,139.319) v1(275.463,139.319)
  Bottom Layer w0.254: P5.2@101.092,42.418 102.362,43.688 171.323,43.688 171.831,44.196 v1(171.831,139.319) P1.19@171.831,145.542 173.101,146.812 173.101,153.035 174.244,154.178 247.142,154.178 248.412,152.908 P3.2@248.412,148.082 ; P10_STEPPER5.3@243.958,273.939 273.812,273.939 277.495,270.256 277.495,141.351 v1(275.463,139.319)
DIR6: P1.21 P3.1 P5.1 P10_STEPPER6.3 | length 510
  Top Layer w0.254: v1(174.371,141.224) v1(278.892,141.224)
  Bottom Layer w0.254: P5.1@103.632,42.418 173.609,42.418 174.371,43.18 v1(174.371,141.224) P1.21@174.371,145.542 174.371,145.669 175.641,146.939 175.641,152.4 176.784,153.543 242.189,153.543 243.078,152.654 243.078,146.812 244.348,145.542 P3.1@248.412,145.542 ; v1(278.892,141.224) 279.527,141.859 279.527,272.034 281.432,273.939 P10_STEPPER6.3@292.354,273.939
E\N\A\: P1.40 P2.2 P4.2 P10_STEPPER1.5 P10_STEPPER2.5 P10_STEPPER3.5 P10_STEPPER4.5 P10_STEPPER5.5 P10_STEPPER6.5 R11.1 R12.1 R13.1 | length 630.2
  Top Layer w0.254: R12.1@97.536,19.719 101.058,19.719 P4.2@101.092,19.685 ; P1.40@197.231,148.082 201.041,148.082 201.295,147.828 R13.1@201.295,146.719 ; v1(203.327,148.082) v1(203.327,279.019) ; R11.1@213.233,146.719 v1(213.233,148.082)
  Bottom Layer w0.254: P10_STEPPER1.5@50.373,279.019 P10_STEPPER2.5@98.769,279.019 P10_STEPPER3.5@147.165,279.019 P10_STEPPER4.5@195.561,279.019 v1(203.327,279.019) P10_STEPPER5.5@243.958,279.019 P10_STEPPER6.5@292.354,279.019 ; P4.2@101.092,19.685 102.362,20.955 198.12,20.955 198.628,21.463 198.628,148.082 ; P1.40@197.231,148.082 198.628,148.082 ; P2.2@219.456,148.082 v1(213.233,148.082) v1(203.327,148.082) 198.628,148.082
EGND: C3_STEPPER1.2 C3_STEPPER2.2 C3_STEPPER3.2 C3_STEPPER4.2 C3_STEPPER5.2 C3_STEPPER6.2 C4_STEPPER1.2 C4_STEPPER2.2 C4_STEPPER3.2 C4_STEPPER4.2 C4_STEPPER5.2 C4_STEPPER6.2 C5_STEPPER1.2 C5_STEPPER2.2 C5_STEPPER3.2 C5_STEPPER4.2 C5_STEPPER5.2 C5_STEPPER6.2 D1.1 D2_STEPPER1.1 D2_STEPPER2.1 D2_STEPPER3.1 D2_STEPPER4.1 D2_STEPPER5.1 D2_STEPPER6.1 P11_STEPPER1.2 P11_STEPPER2.2 P11_STEPPER3.2 P11_STEPPER4.2 P11_STEPPER5.2 P11_STEPPER6.2 pad.1 PIN*2.1 PIN*14.1 PIN*27_STEPPER1.1 PIN*27_STEPPER2.1 PIN*27_STEPPER3.1 PIN*27_STEPPER4.1 PIN*27_STEPPER5.1 PIN*27_STEPPER6.1 R1_STEPPER1.1 R1_STEPPER2.1 R1_STEPPER3.1 R1_STEPPER4.1 R1_STEPPER5.1 R1_STEPPER6.1 R4.2 R5_STEPPER1.2 R5_STEPPER2.2 R5_STEPPER3.2 R5_STEPPER4.2 R5_STEPPER5.2 R5_STEPPER6.2 U1_STEPPER1.0 U1_STEPPER1.6 U1_STEPPER2.0 U1_STEPPER2.6 U1_STEPPER3.0 U1_STEPPER3.6 U1_STEPPER4.0 U1_STEPPER4.6 U1_STEPPER5.0 U1_STEPPER5.6 U1_STEPPER6.0 U1_STEPPER6.6 | length 476.4
  Top Layer w0.762: 25.781,169.643 U1_STEPPER1.0@25.781,166.37 26.416,165.735 U1_STEPPER1.6@28.381,165.735 29.537,165.735 ; 74.51,170.461 U1_STEPPER2.0@74.51,166.37 75.145,165.735 U1_STEPPER2.6@77.11,165.735 78.023,165.735 ; 123.239,169.934 U1_STEPPER3.0@123.239,166.37 123.874,165.735 U1_STEPPER3.6@125.839,165.735 127.127,165.735 ; 171.969,170.309 U1_STEPPER4.0@171.969,166.37 172.604,165.735 U1_STEPPER4.6@174.569,165.735 175.879,165.735 ; 220.698,170.146 U1_STEPPER5.0@220.698,166.37 221.333,165.735 U1_STEPPER5.6@223.298,165.735 224.877,165.735 ; 269.427,170.501 U1_STEPPER6.0@269.427,166.37 270.062,165.735 U1_STEPPER6.6@272.027,165.735 273.377,165.735
  Top Layer w2.032: 12.827,125.222 PIN*14.1@17.272,125.222 ; 17.272,120.904 PIN*14.1@17.272,125.222 ; 17.272,129.286 PIN*14.1@17.272,125.222 ; 24.003,125.222 PIN*14.1@17.272,125.222 ; 43.942,226.509 PIN*27_STEPPER1.1@50.419,226.509 PIN*27_STEPPER2.1@98.806,226.509 PIN*27_STEPPER3.1@147.193,226.509 PIN*27_STEPPER4.1@195.58,226.509 200.719,226.509 ; 238.701,226.509 PIN*27_STEPPER5.1@243.967,226.509 PIN*27_STEPPER6.1@292.354,226.509 296.613,226.509
  Bottom Layer w2.032: 13.716,125.222 PIN*14.1@17.272,125.222 ; 17.272,120.142 PIN*14.1@17.272,125.222 ; 17.272,130.048 PIN*14.1@17.272,125.222 ; 21.59,125.222 PIN*14.1@17.272,125.222 ; 43.62,226.509 PIN*27_STEPPER1.1@50.419,226.509 56.075,226.509 ; 94.107,226.509 PIN*27_STEPPER2.1@98.806,226.509 PIN*27_STEPPER3.1@147.193,226.509 PIN*27_STEPPER4.1@195.58,226.509 PIN*27_STEPPER5.1@243.967,226.509 248.353,226.509 ; 287.596,226.509 PIN*27_STEPPER6.1@292.354,226.509 297.747,226.509
  other v1: 54.864,186.182 57.573,186.182 60.283,186.182 62.992,186.182 103.886,186.182 106.595,186.182 109.305,186.182 112.014,186.182 152.019,186.182 154.728,186.182 157.438,186.182 160.147,186.182 204.343,186.182 206.883,186.182 209.423,186.182 211.963,186.182 250.444,186.182 253.153,186.182 255.863,186.182 258.572,186.182 54.864,188.341 57.573,188.341 60.283,188.341 62.992,188.341 103.886,188.341 106.595,188.341 109.305,188.341 112.014,188.341 152.019,188.341 154.728,188.341 157.438,188.341 160.147,188.341 204.343,188.341 206.883,188.341 209.423,188.341 211.963,188.341 250.444,188.341 253.153,188.341 255.863,188.341 258.572,188.341
GND: P1.6 P1.9 P1.14 P1.20 P1.25 P1.30 P1.34 P1.39 P2.9 P2.10 P3.9 P3.10 P4.9 P4.10 P5.9 P5.10 P10_STEPPER1.2 P10_STEPPER1.4 P10_STEPPER1.6 P10_STEPPER2.2 P10_STEPPER2.4 P10_STEPPER2.6 P10_STEPPER3.2 P10_STEPPER3.4 P10_STEPPER3.6 P10_STEPPER4.2 P10_STEPPER4.4 P10_STEPPER4.6 P10_STEPPER5.2 P10_STEPPER5.4 P10_STEPPER5.6 P10_STEPPER6.2 P10_STEPPER6.4 P10_STEPPER6.6 P12.1
  other v1: 193.421,23.495 190.881,25.146 173.101,57.912 185.674,62.23 173.101,63.373 165.481,115.57 165.481,124.206 165.481,132.461 190.881,134.837 193.421,134.837 173.101,135.382 276.025,142.494 185.674,143.002 245.364,147.453 245.364,152.167 174.879,153.416 166.751,154.552 276.025,156.21 282.829,156.21 283.083,271.399 278.003,276.352 283.083,276.479 278.003,283.718 283.083,283.718
NetC1_STEPPER1_1: C1_STEPPER1.1 U1_STEPPER1.1
NetC1_STEPPER1_2: C1_STEPPER1.2 D2_STEPPER1.2 L1_STEPPER1.1 U1_STEPPER1.8
NetC1_STEPPER2_1: C1_STEPPER2.1 U1_STEPPER2.1
NetC1_STEPPER2_2: C1_STEPPER2.2 D2_STEPPER2.2 L1_STEPPER2.1 U1_STEPPER2.8
NetC1_STEPPER3_1: C1_STEPPER3.1 U1_STEPPER3.1
NetC1_STEPPER3_2: C1_STEPPER3.2 D2_STEPPER3.2 L1_STEPPER3.1 U1_STEPPER3.8
NetC1_STEPPER4_1: C1_STEPPER4.1 U1_STEPPER4.1
NetC1_STEPPER4_2: C1_STEPPER4.2 D2_STEPPER4.2 L1_STEPPER4.1 U1_STEPPER4.8
NetC1_STEPPER5_1: C1_STEPPER5.1 U1_STEPPER5.1
NetC1_STEPPER5_2: C1_STEPPER5.2 D2_STEPPER5.2 L1_STEPPER5.1 U1_STEPPER5.8
NetC1_STEPPER6_1: C1_STEPPER6.1 U1_STEPPER6.1
NetC1_STEPPER6_2: C1_STEPPER6.2 D2_STEPPER6.2 L1_STEPPER6.1 U1_STEPPER6.8
NetC2_STEPPER1_2: C2_STEPPER1.2 R2_STEPPER1.2 R2_STEPPER1.3 R3_STEPPER1.2 U1_STEPPER1.4 | length 26.6
  Top Layer w0.508: R2_STEPPER1.2@16.51,169.164 18.288,169.164 19.05,168.402 R2_STEPPER1.3@19.05,166.624 19.05,164.973 19.558,164.465 21.717,164.465 ; U1_STEPPER1.4@23.181,164.465 21.717,164.465 ; R3_STEPPER1.2@32.419,166.853 C2_STEPPER1.2@32.419,162.865 22.174,162.865 21.717,163.322 21.717,164.465
NetC2_STEPPER2_2: C2_STEPPER2.2 R2_STEPPER2.2 R2_STEPPER2.3 R3_STEPPER2.2 U1_STEPPER2.4 | length 26.3
  Top Layer w0.508: R2_STEPPER2.2@65.176,169.164 67.056,169.164 67.716,168.504 R2_STEPPER2.3@67.716,166.624 67.716,165.075 68.326,164.465 70.612,164.465 ; U1_STEPPER2.4@71.91,164.465 70.612,164.465 ; R3_STEPPER2.2@81.162,166.853 C2_STEPPER2.2@81.162,162.865 71.45,162.865 70.612,163.703 70.612,164.465
NetC2_STEPPER3_2: C2_STEPPER3.2 R2_STEPPER3.2 R2_STEPPER3.3 R3_STEPPER3.2 U1_STEPPER3.4 | length 27.2
  Top Layer w0.508: R2_STEPPER3.2@113.843,169.164 115.951,169.164 116.383,168.732 R2_STEPPER3.3@116.383,166.624 116.383,164.922 116.84,164.465 118.999,164.465 ; U1_STEPPER3.4@120.639,164.465 118.999,164.465 ; R3_STEPPER3.2@129.904,166.853 C2_STEPPER3.2@129.904,162.865 119.456,162.865 118.999,163.322 118.999,164.465
NetC2_STEPPER4_2: C2_STEPPER4.2 R2_STEPPER4.2 R2_STEPPER4.3 R3_STEPPER4.2 U1_STEPPER4.4 | length 27
  Top Layer w0.508: R2_STEPPER4.2@162.509,169.164 164.592,169.164 165.049,168.707 R2_STEPPER4.3@165.049,166.624 165.049,165.151 165.735,164.465 167.894,164.465 ; U1_STEPPER4.4@169.369,164.465 167.894,164.465 ; R3_STEPPER4.2@178.647,166.853 C2_STEPPER4.2@178.647,162.865 168.351,162.865 167.894,163.322 167.894,164.465
NetC2_STEPPER5_2: C2_STEPPER5.2 R2_STEPPER5.2 R2_STEPPER5.3 R3_STEPPER5.2 U1_STEPPER5.4 | length 27.2
  Top Layer w0.508: R2_STEPPER5.2@211.176,169.164 213.36,169.164 213.716,168.808 R2_STEPPER5.3@213.716,166.624 213.716,165.125 214.376,164.465 216.662,164.465 ; U1_STEPPER5.4@218.098,164.465 216.662,164.465 ; R3_STEPPER5.2@227.389,166.853 C2_STEPPER5.2@227.389,162.865 216.916,162.865 216.662,163.119 216.662,164.465
NetC2_STEPPER6_2: C2_STEPPER6.2 R2_STEPPER6.2 R2_STEPPER6.3 R3_STEPPER6.2 U1_STEPPER6.4 | length 27.7
  Top Layer w0.508: R2_STEPPER6.2@259.842,169.164 261.747,169.164 262.382,168.529 R2_STEPPER6.3@262.382,166.624 262.382,164.846 262.763,164.465 265.049,164.465 ; U1_STEPPER6.4@266.827,164.465 265.049,164.465 ; R3_STEPPER6.2@276.132,166.853 C2_STEPPER6.2@276.132,162.865 265.176,162.865 265.049,162.992 265.049,164.465
NetD3_K: D3.K R4.1 | length 3.9
  Top Layer w0.254: D3.K@17.107,151.385 17.145,151.423 R4.1@17.145,155.228
NetD4_STEPPER1_K: D4_STEPPER1.K R5_STEPPER1.1 | length 3.7
  Top Layer w0.762: D4_STEPPER1.K@50.673,167.766 51.817,167.766 52.417,167.166 R5_STEPPER1.1@54.102,167.166
NetD4_STEPPER2_K: D4_STEPPER2.K R5_STEPPER2.1 | length 3.8
  Top Layer w0.762: D4_STEPPER2.K@99.39,167.766 100.331,167.766 101.184,166.913 R5_STEPPER2.1@102.819,166.913
NetD4_STEPPER3_K: D4_STEPPER3.K R5_STEPPER3.1 | length 3.8
  Top Layer w0.762: D4_STEPPER3.K@148.107,167.766 149.226,167.766 150.079,166.913 R5_STEPPER3.1@151.536,166.913
NetD4_STEPPER4_K: D4_STEPPER4.K R5_STEPPER4.1 | length 3.8
  Top Layer w0.762: D4_STEPPER4.K@196.825,167.766 197.867,167.766 198.72,166.913 R5_STEPPER4.1@200.254,166.913
NetD4_STEPPER5_K: D4_STEPPER5.K R5_STEPPER5.1 | length 3.8
  Top Layer w0.762: D4_STEPPER5.K@245.542,167.766 246.635,167.766 247.488,166.913 R5_STEPPER5.1@248.971,166.913
NetD4_STEPPER6_K: D4_STEPPER6.K R5_STEPPER6.1 | length 3.8
  Top Layer w0.762: D4_STEPPER6.K@294.259,167.766 295.149,167.766 296.002,166.913 R5_STEPPER6.1@297.688,166.913
NetR1_STEPPER1_2: R1_STEPPER1.2 R2_STEPPER1.1 | length 3.8
  Top Layer w0.508: R1_STEPPER1.2@10.16,166.623 R2_STEPPER1.1@13.97,166.624 R2_STEPPER1.1@13.97,166.624
NetR1_STEPPER2_2: R1_STEPPER2.2 R2_STEPPER2.1 | length 3.8
  Top Layer w0.508: R1_STEPPER2.2@58.826,166.623 R2_STEPPER2.1@62.636,166.624 R2_STEPPER2.1@62.636,166.624
NetR1_STEPPER3_2: R1_STEPPER3.2 R2_STEPPER3.1 | length 3.8
  Top Layer w0.508: R1_STEPPER3.2@107.493,166.623 R2_STEPPER3.1@111.303,166.624 R2_STEPPER3.1@111.303,166.624
NetR1_STEPPER4_2: R1_STEPPER4.2 R2_STEPPER4.1 | length 3.8
  Top Layer w0.508: R1_STEPPER4.2@156.159,166.623 R2_STEPPER4.1@159.969,166.624 R2_STEPPER4.1@159.969,166.624
NetR1_STEPPER5_2: R1_STEPPER5.2 R2_STEPPER5.1 | length 3.8
  Top Layer w0.508: R1_STEPPER5.2@204.826,166.623 R2_STEPPER5.1@208.636,166.624 R2_STEPPER5.1@208.636,166.624
NetR1_STEPPER6_2: R1_STEPPER6.2 R2_STEPPER6.1 | length 3.8
  Top Layer w0.508: R1_STEPPER6.2@253.492,166.623 R2_STEPPER6.1@257.302,166.624 R2_STEPPER6.1@257.302,166.624
PLUSE1: P1.23 P2.8 P4.8 P10_STEPPER1.1 | length 495.3
  Top Layer w0.254: v1(79.121,152.527) v1(178.181,152.527)
  Bottom Layer w0.254: P10_STEPPER1.1@50.373,268.859 75.057,268.859 79.121,264.795 v1(79.121,152.527) ; P4.8@101.092,27.305 102.362,28.575 176.022,28.575 176.911,29.464 176.911,96.774 P1.23@176.911,145.542 178.181,146.812 v1(178.181,152.527) 178.562,152.908 226.06,152.908 227.076,151.892 P2.8@227.076,148.082
PLUSE2: P1.29 P2.7 P4.7 P10_STEPPER2.1 | length 485.2
  Top Layer w0.254: v1(84.201,151.765) v1(185.801,151.765)
  Bottom Layer w0.254: v1(84.201,151.765) 84.201,267.97 85.09,268.859 P10_STEPPER2.1@98.769,268.859 ; P4.7@103.632,27.305 183.896,27.305 184.531,27.94 184.531,110.871 P1.29@184.531,145.542 185.801,146.812 v1(185.801,151.765) 186.182,152.146 225.298,152.146 225.806,151.638 225.806,146.812 P2.7@227.076,145.542
PLUSE3: P1.31 P2.6 P4.6 P10_STEPPER3.1 | length 523.3
  Top Layer w0.254: v1(88.011,150.749) v1(188.341,150.749)
  Bottom Layer w0.254: v1(88.011,150.749) 88.011,261.112 88.646,261.747 108.204,261.747 115.316,268.859 P10_STEPPER3.1@147.165,268.859 ; P4.6@101.092,24.765 102.489,26.162 185.928,26.162 187.071,27.305 P1.31@187.071,145.542 188.341,146.812 v1(188.341,150.749) 189.103,151.511 223.266,151.511 224.536,150.241 P2.6@224.536,148.082
PLUSE4: P1.33 P2.5 P4.5 P10_STEPPER4.1 | length 535.5
  Top Layer w0.254: v1(189.611,137.033) v1(269.621,137.033)
  Bottom Layer w0.254: P4.5@103.632,24.765 188.087,24.765 189.611,26.289 v1(189.611,137.033) P1.33@189.611,145.542 190.881,146.812 190.881,149.225 192.405,150.749 222.25,150.749 223.266,149.733 223.266,146.812 P2.5@224.536,145.542 ; P10_STEPPER4.1@195.561,268.859 232.156,268.859 236.347,264.668 271.018,264.668 273.304,262.382 273.304,140.716 v1(269.621,137.033)